# Altium PCB SSOP-24_L8.4-W5.8-P0.65-LS7.8-BL.pcbdoc
Units mm, origin at the board's own origin, x right, y up, seen from the top; angles counter-clockwise.
Board outline 925.15 x 907.4 mm, 2 copper layers (Top Layer, Bottom Layer); 1 components, 0 nets, 24 pads, 0 vias.
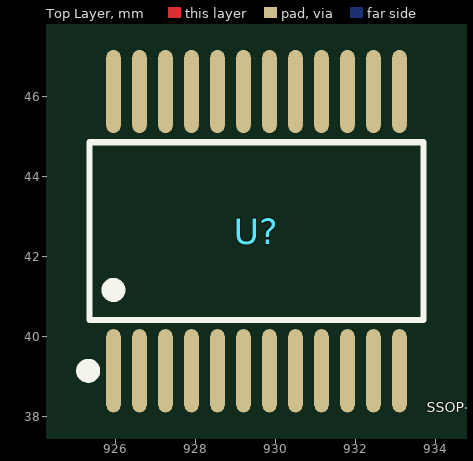
[diagram p0: Top Layer view]
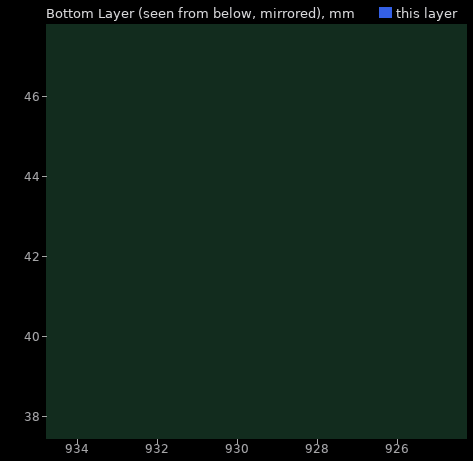
[diagram p1: Bottom Layer view, seen from below]

## Layer stack, top to bottom
Top Layer: signal copper (thickness not stored)
Dielectric: dielectric 0.32, FR-4, Dk 4.8
Bottom Layer: signal copper (thickness not stored)

## Board outline
950.546,25.4 25.4,25.4 25.4,932.802 950.546,932.802

## Components (designator, comment, footprint, x,y, rotation, side; value= is the part's Value field where it differs from the comment)
U? "SSOP-24_L8.4-W5.8-P0.65-LS7.8-BL" SSOP-24_L8.4-W5.8-P0.65-LS7.8-BL 485.941,478.974 r0 top

## Footprints (in the part's own frame and the unit in brackets; to place one, negate y for a bottom-side part, rotate by r counter-clockwise, add the part's x,y. Pads: shape width x height; smd on the part's side, far side on the other; paste and mask are expansions set on the pad)
SSOP-24_L8.4-W5.8-P0.65-LS7.8-BL [mm]
  oval 0.364x2.082 smd paste+0 mask+0.051: 1(440.014,-439.833) 2(440.664,-439.833) 3(441.314,-439.833) 4(441.964,-439.833) 5(442.614,-439.833) 6(443.264,-439.833) 7(443.914,-439.833) 8(444.564,-439.833) 9(445.214,-439.833) 10(445.864,-439.833) 11(446.514,-439.833) 12(447.164,-439.833) 13(447.164,-432.851) 14(446.514,-432.851) 15(445.864,-432.851) 16(445.214,-432.851) 17(444.564,-432.851) 18(443.914,-432.851) 19(443.264,-432.851) 20(442.614,-432.851) 21(441.964,-432.851) 22(441.314,-432.851) 23(440.664,-432.851) 24(440.014,-432.851)
  silkscreen extent 439.23,-439.98 447.76,-434.12

## Nets (pads, with @x,y where several pads share a name; then routed paths per layer and width w, separated by ;. In a path a pad name is that pad's centre, name@x,y a point inside that pad or via, vN(x,y) a via of type N, cw(c..) or ccw(c..) an arc to the next point about the centre after c; other vN are vias at no path point)
pads on no net: U?.1 U?.2 U?.3 U?.4 U?.5 U?.6 U?.7 U?.8 U?.9 U?.10 U?.11 U?.12 U?.13 U?.14 U?.15 U?.16 U?.17 U?.18 U?.19 U?.20 U?.21 U?.22 U?.23 U?.24